# EAGLE board EpicCircuito (EAGLE 7.6.0)

Size 56.82 x 53.33 mm. Coordinates in mm from the lower left corner, seen from the top.
Outline: 0,0 56.82,0 56.82,53.33 0,53.33 0,0
Copper layers (1*16): Top 0.035mm / dielectric 1.5mm / Bottom 0.035mm
Design rules "default": minimum track width 10mil, minimum drill 24mil, track to track 8mil, track to pad 8mil, pad to pad 8mil, via to via 8mil, smd to smd 8mil, copper to edge 40mil, drill to drill 8mil, minimum pad ring 10mil, minimum via ring 8mil, stop-mask expansion 4mil, vias tented up to drill 0mil, thermal gap 10mil

## Footprints (pad centres in the part's own frame; a part is rotated, then mirrored left to right if it is on the bottom)
DC-POWER = drill 0.889 pad 2.54 octagon: + 0,2.54; - 0,-2.54
2P-2.54-65/35MIL = drill 0.889 pad 1.651 square: 1 0,1.27 | drill 0.889 pad 1.651: 2 0,-1.27
0207/10 = drill 0.813 octagon: 1 -5.08,0; 2 5.08,0

## Placement (x,y rotation side)
Meter2  [DC-POWER]  5,10.08 0 top
Meter4  [DC-POWER]  5,98.98 0 top  (outside the outline)
Meter5  [DC-POWER]  5,111.68 0 top  (outside the outline)
Meter6  [DC-POWER]  5,124.38 0 top  (outside the outline)
Meter10  [DC-POWER]  5,213.28 0 top  (outside the outline)
Meter11  [DC-POWER]  5,225.98 0 top  (outside the outline)
Meter12  [DC-POWER]  5,238.68 0 top  (outside the outline)
Meter14  [DC-POWER]  5,251.38 0 top  (outside the outline)
Meter15  [DC-POWER]  5,264.08 0 top  (outside the outline)
Meter16  [DC-POWER]  5,352.98 0 top  (outside the outline)
P1  10V  [2P-2.54-65/35MIL]  5,200.58 0 top  (outside the outline)
P2  10V  [2P-2.54-65/35MIL]  5,86.28 0 top  (outside the outline)
P3  10V  [2P-2.54-65/35MIL]  5,340.28 0 top  (outside the outline)
R1  1k‎Ω  [0207/10]  5,60.88 0 top  (outside the outline)
R2  3.9k‎Ω  [0207/10]  5,73.58 0 top  (outside the outline)
R3  2.2k‎Ω  [0207/10]  5,22.78 0 top
R4  2.2k‎Ω  [0207/10]  5,137.08 0 top  (outside the outline)
R5  2.2k‎Ω  [0207/10]  5,48.18 0 top
R6  1.8k‎Ω  [0207/10]  5,149.78 0 top  (outside the outline)
R7  1.8k‎Ω  [0207/10]  5,35.48 0 top
R8  2.2k‎Ω  [0207/10]  5,162.48 0 top  (outside the outline)
R9  1k‎Ω  [0207/10]  5,175.18 0 top  (outside the outline)
R10  3.9k‎Ω  [0207/10]  5,187.88 0 top  (outside the outline)
R11  1k‎Ω  [0207/10]  5,276.78 0 top  (outside the outline)
R12  2.2k‎Ω  [0207/10]  5,289.48 0 top  (outside the outline)
R13  3.9k‎Ω  [0207/10]  5,302.18 0 top  (outside the outline)
R14  2.2k‎Ω  [0207/10]  5,314.88 0 top  (outside the outline)
R15  1.8k‎Ω  [0207/10]  5,327.58 0 top  (outside the outline)

## Library data of the parts
Meter2 Meter4-Meter6 Meter10-Meter12 Meter14-Meter16 P1-P3 R1-R15 = AUTODESK_CIRCUITS_BREADBOARD

## Nets
N$1: Meter2.- Meter4.+ Meter16.+ R1.2 R2.2 R3.1
N$2: Meter2.+ P2.2 R1.1
N$3: Meter4.- Meter5.- Meter6.+ R2.1 R5.1 R7.2
N$4: Meter6.- P2.1 R7.1
N$5: Meter5.+ Meter16.- R3.2 R5.2
N$6: Meter14.+ R4.1 R9.2
N$7: Meter12.+ R6.1
N$8: Meter11.+ R4.2
N$9: Meter10.- R6.2
N$10: Meter11.- R8.2
N$11: Meter12.- P1.1
N$12: Meter10.+ R8.1 R10.1
N$13: Meter15.- R9.1
N$14: Meter14.- R10.2
N$15: Meter15.+ P1.2
N$16: R11.2 R12.1 R13.2
N$17: R12.2 R14.2
N$18: R13.1 R14.1 R15.2
N$19: P3.1 R15.1
N$20: P3.2 R11.1

## Tracks (layer width: path | path; a pad name or v marks a point on that pad's centre or on a via)
N$1  (5 unrouted)
N$2  (2 unrouted)
N$3  (5 unrouted)
N$4  (2 unrouted)
N$5  (3 unrouted)
N$6  (2 unrouted)
N$7  (1 unrouted)
N$8  (1 unrouted)
N$9  (1 unrouted)
N$10  (1 unrouted)
N$11  (1 unrouted)
N$12  (2 unrouted)
N$13  (1 unrouted)
N$14  (1 unrouted)
N$15  (1 unrouted)
N$16  (2 unrouted)
N$17  (1 unrouted)
N$18  (2 unrouted)
N$19  (1 unrouted)
N$20  (1 unrouted)